# Altium PCB Breakout_layout_B.PcbDoc
Units mil, origin at the board's own origin, x right, y up, seen from the top; angles counter-clockwise.
Board outline 400 x 1080 mil, 2 copper layers (Top Layer, Bottom Layer); 15 components, 14 nets, 44 pads, 0 vias.
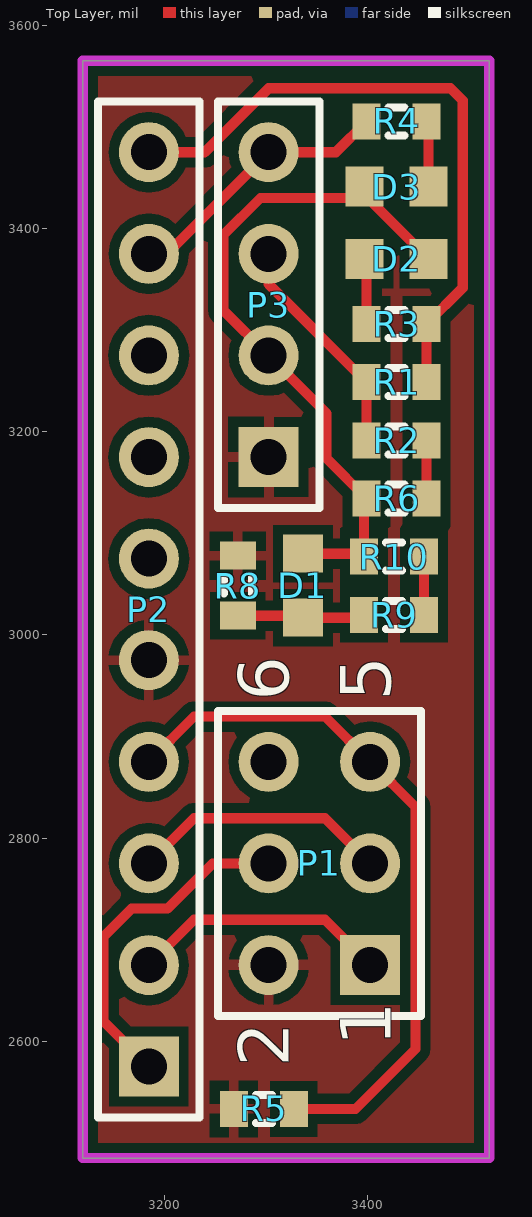
[diagram p0: Top Layer view]
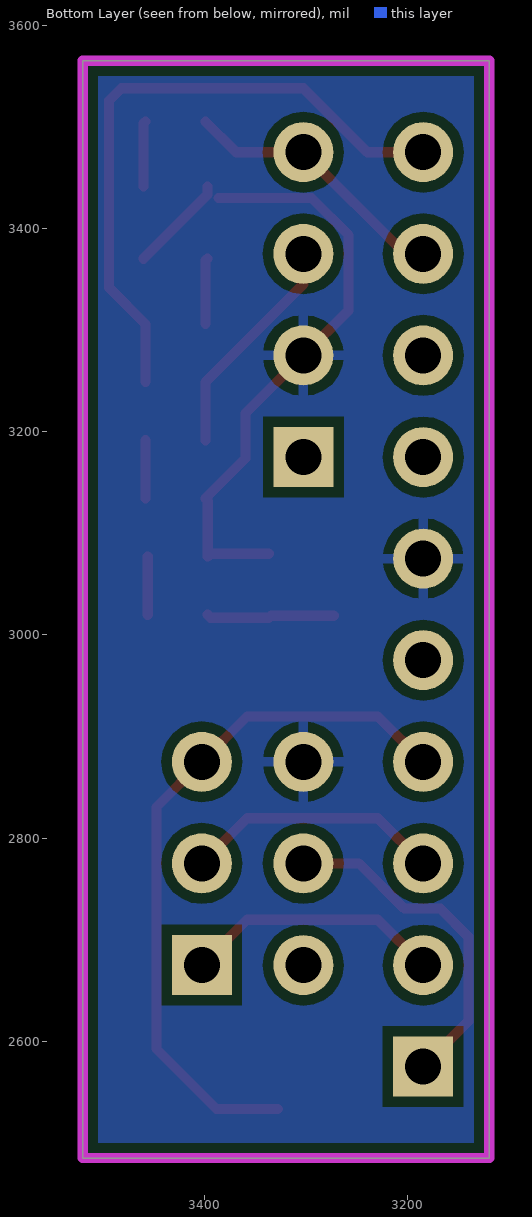
[diagram p1: Bottom Layer view, seen from below]

## Layer stack, top to bottom
Top Solder: solder mask 0.4, Solder Resist, Dk 3.5
Top Layer: signal copper 1.4
Dielectric 1: dielectric 12.6, FR-4, Dk 4.8
Bottom Layer: signal copper 1.4
Bottom Solder: solder mask 0.4, Solder Resist, Dk 3.5

## Board outline
3120,2485 3120,3565 3520,3565 3520,2485

## Design rules (kind name [scope] priority, off if disabled: settings)
Clearance [All] p1: gap=10
PolygonConnect [All] p1: connectstyle=Relief reliefconductorwidth=10 reliefentries=4 polygonreliefangle="90 Angle" airgapwidth=10
RoomDefinition Breakout_schematic [InComponentClass('Breakout_schematic')] p1: confinementstyle=ConfineIn formatcopy=TRUE lockcomponents=FALSE outline 3520,3565 3120,3565 3120,2485 3520,2485
RoutingVias [All] p1: holewidth=28 width=50 viastyle="Through Hole" minholewidth=28 minwidth=50 maxholewidth=28 maxwidth=50
SolderMaskExpansion [All] p1: expansion=4
Width [All] p1: maxlimit=10 minlimit=10 preferedwidth=10
30 further rules are at their usual default settings.

## Components (designator, comment, footprint, x,y, rotation, side; value= is the part's Value field where it differs from the comment)
D1 "LED1" L0603 3336.71,3048.34 r90 top
D2 "LED1" L0603 3428.84,3370.14 r0 top
D3 "LED1" L0603 3428.84,3441.17 r180 top
P1 "Header 3X2" HDR2X3 3402.88,2675 r90 top
P2 "Header 10" HDR1X10 3185,2575 r90 top
P3 "Header 4" HDR1X4 3302.88,3175 r90 top
R1 "Res3" J1-0603 3428.84,3248.74 r180 top
R2 "Res3" J1-0603 3428.84,3191.49 r0 top
R3 "Res3" J1-0603 3428.84,3305.99 r0 top
R4 "Res3" J1-0603 3428.84,3505.32 r180 top
R5 "Res3" J1-0603 3298.16,2533.37 r180 top
R6 "Res3" J1-0603 3428.84,3134.23 r180 top
R8 "Res3" J1-0603 3272.57,3048.34 r270 top
R9 "Res3" J1-0603 3426.45,3019.72 r0 top
R10 "Res3" J1-0603 3426.45,3076.98 r180 top

## Footprints (in the part's own frame and the unit in brackets; to place one, negate y for a bottom-side part, rotate by r counter-clockwise, add the part's x,y. Pads: shape width x height; smd on the part's side, far side on the other; paste and mask are expansions set on the pad)
HDR1X4 [mm] "Connector; Header; 4 Position"
  rect 1.5x1.5 hole 0.9: 1(0,0)
  round 1.5 hole 0.9: 2(2.54,0) 3(5.08,0) 4(7.62,0)
  silkscreen extent -1.27,-1.27 8.89,1.27
HDR1X10 [mm] "Connector; Header; 10 Position"
  rect 1.5x1.5 hole 0.9: 1(0,0)
  round 1.5 hole 0.9: 2(2.54,0) 3(5.08,0) 4(7.62,0) 5(10.16,0) 6(12.7,0) 7(15.24,0) 8(17.78,0) 9(20.32,0) 10(22.86,0)
  silkscreen extent -1.27,-1.27 24.13,1.27
HDR2X3 [mm] "Connector; Header; 3x2 Position"
  rect 1.5x1.5 hole 0.9: 1(0,0)
  round 1.5 hole 0.9: 2(0,2.54) 3(2.54,0) 4(2.54,2.54) 5(5.08,0) 6(5.08,2.54)
  silkscreen extent -1.27,-1.27 6.35,3.81
J1-0603 [mm] "Chip Resistor, Body 1.6x0.8mm, IPC High Density"
  rect 0.7x0.9 smd: 1(-0.75,0) 2(0.75,0)
  silkscreen extent -0.2,-0.35 0.2,0.35, body extent -0.85,-0.48 0.85,0.48, height 0.9
L0603 [mm]
  rect 0.95x1 smd: 1(-0.8,0) 2(0.8,0)

## Part data
D1 D2 D3: "Typical RED GaAs LED"
P1: "Header, 3-Pin, Dual row"
P2: "Header, 10-Pin"
P3: "Header, 4-Pin"
R1 R2 R3 R4 R5 R6 R8 R9 R10: "Resistor"

## Nets (pads, with @x,y where several pads share a name; then routed paths per layer and width w, separated by ;. In a path a pad name is that pad's centre, name@x,y a point inside that pad or via, vN(x,y) a via of type N, cw(c..) or ccw(c..) an arc to the next point about the centre after c; other vN are vias at no path point)
GND: D1.2 D2.2 D3.2 P1.6 P2.6 P3.2 R6.2 R10.2 | length 677.3
  Top Layer w10: D1.2 3394.06,3079.84 R10.2 3396.92,3131.84 R6.2 3360,3173.54 3360,3217.88 P3.2 3258.36,3319.53 3258.36,3393.44 3294.91,3430 D3.2@3386.17,3430 ; D3.2 3397.34,3433.13 D2.2
MISO: P1.1 P2.2 | length 254.8
  Top Layer w10: P2.2 3229.53,2719.53 3358.36,2719.53 P1.1
MOSI: P1.4 P2.1 | length 338.7
  Top Layer w10: P2.1 3140.47,2619.53 3140.47,2702.97 3167.97,2730.47 3203.44,2730.47 3247.97,2775 P1.4
NetD2_1: D2.1 R3.1 | length 65
  Top Layer w10: D2.1 3399.31,3368.17 R3.1
NetD3_1: D3.1 R4.1 | length 65
  Top Layer w10: R4.1 3460.33,3503.35 D3.1
NetR2_2: R2.2 R6.1 | length 57.3
  Top Layer w10: R6.1 R2.2
NetR9_2: R9.2 R10.1 | length 57.3
  Top Layer w10: R9.2 R10.1
POWER: D1.1 R8.2 R9.1 | length 126.4
  Top Layer w10: R8.2 3334.74,3018.81 D1.1 3394.04,3016.84 R9.1
RESET: P1.5 P2.4 R5.1 | length 700
  Top Layer w10: P2.4 3229.53,2919.53 3358.36,2919.53 P1.5 3447.41,2830.47 3447.41,2592.41 3388.37,2533.37 R5.1
RXD: P2.9 P3.4 R4.2 | length 268.3
  Top Layer w10: P2.9 3202.88,3375 P3.4 3369,3475 R4.2
SCK: P1.3 P2.3 | length 254.8
  Top Layer w10: P2.3 3229.53,2819.53 3358.36,2819.53 P1.3
TXD: P2.10 R1.1 R3.2 | length 632.1
  Top Layer w10: P2.10 3239.91,3475 3302.94,3538.03 3481.9,3538.03 3494.04,3525.9 3494.04,3341.66 R3.2 R1.1
TXD_3.3V: P3.3 R1.2 R2.1 | length 223.5
  Top Layer w10: P3.3 3302.88,3345.17 R1.2 R2.1
VCC: P1.2 P2.5 P3.1 R5.2 R8.1 | length 15.3
  Top Layer w10: P2.5 P2.5@3185,2990.3
pads on no net: P2.7 P2.8

## Polygon pours and split planes (outlines as drawn)
GND on Bottom Layer "GND_L02_P000" (solid, remove dead copper, pour order 0): 3120,2485 3120,3565 3520,3565 3520,2485
VCC on Top Layer "VCC_L01_P001" (solid, remove dead copper, pour order 1): 3120,2485 3120,3565 3520,3565 3520,2485

## Keep-outs
Keep-Out Layer:
  the board outline again, w10

## Text inside footprints (layer, text, board x,y; h text height)
P1: Top Overlay "6" at 3322.88,2935 h50 r90; Top Overlay "5" at 3422.88,2935 h50 r90; Top Overlay "2" at 3322.88,2575 h50 r90; Top Overlay "1" at 3422.88,2595 h50 r90